# Altium PCB Eln1Project.PcbDoc
Units mm, origin at the board's own origin, x right, y up, seen from the top; angles counter-clockwise.
Board outline 27 x 27 mm, 4 copper layers (Top Layer, Internal Plane 1, Internal Plane 2, Bottom Layer), stack 1.57 mm thick; 35 components, 28 nets, 117 pads, 43 vias.
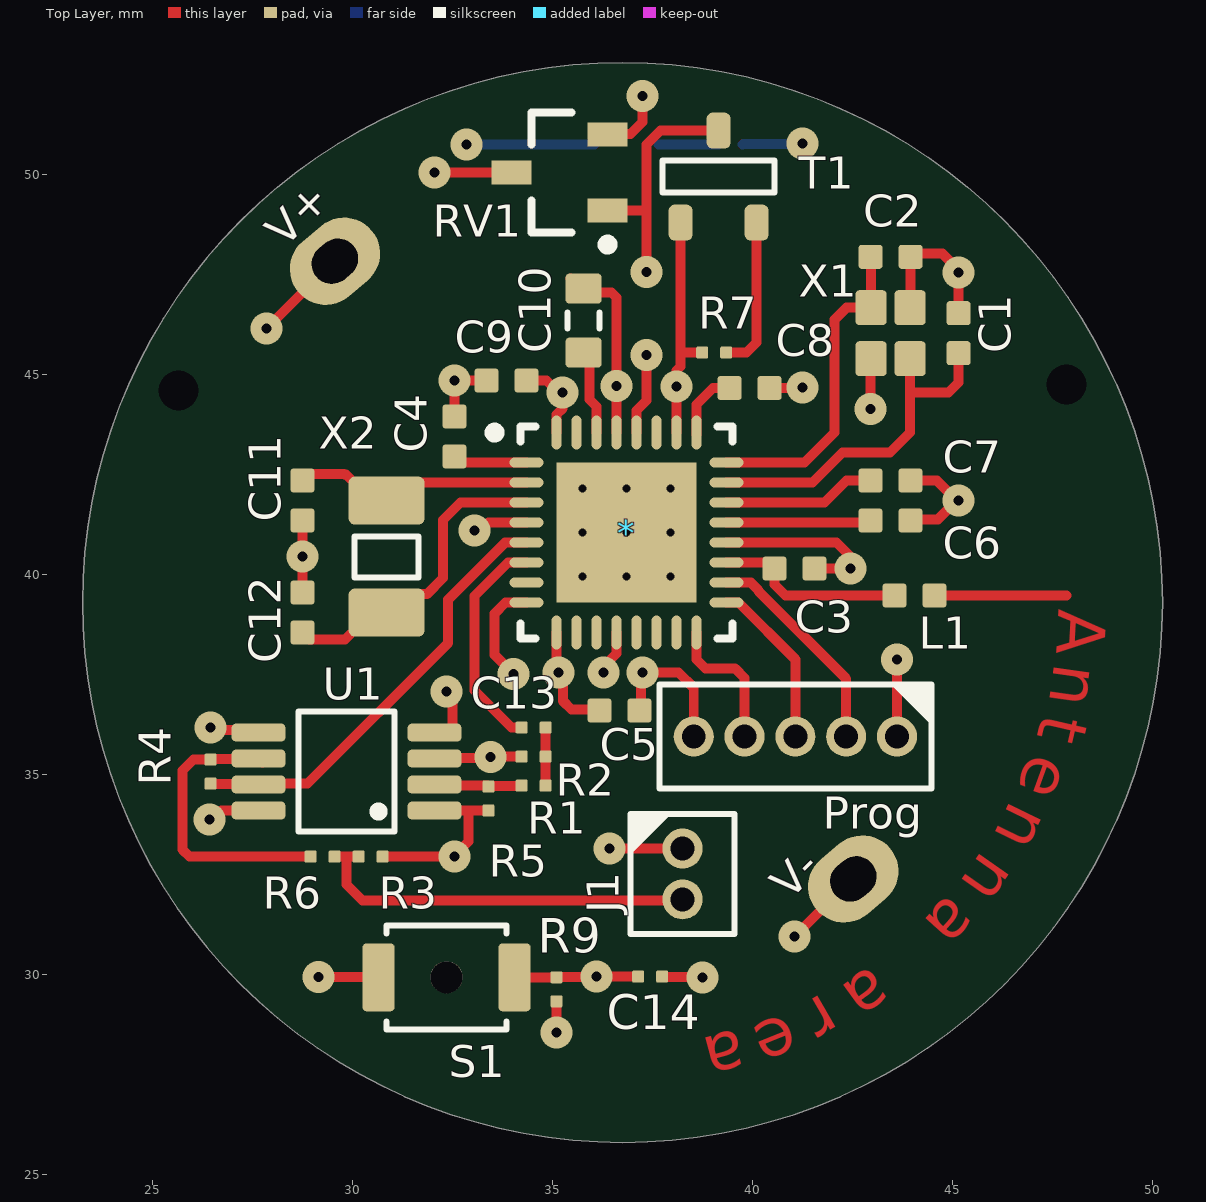
[diagram p0: Top Layer view]
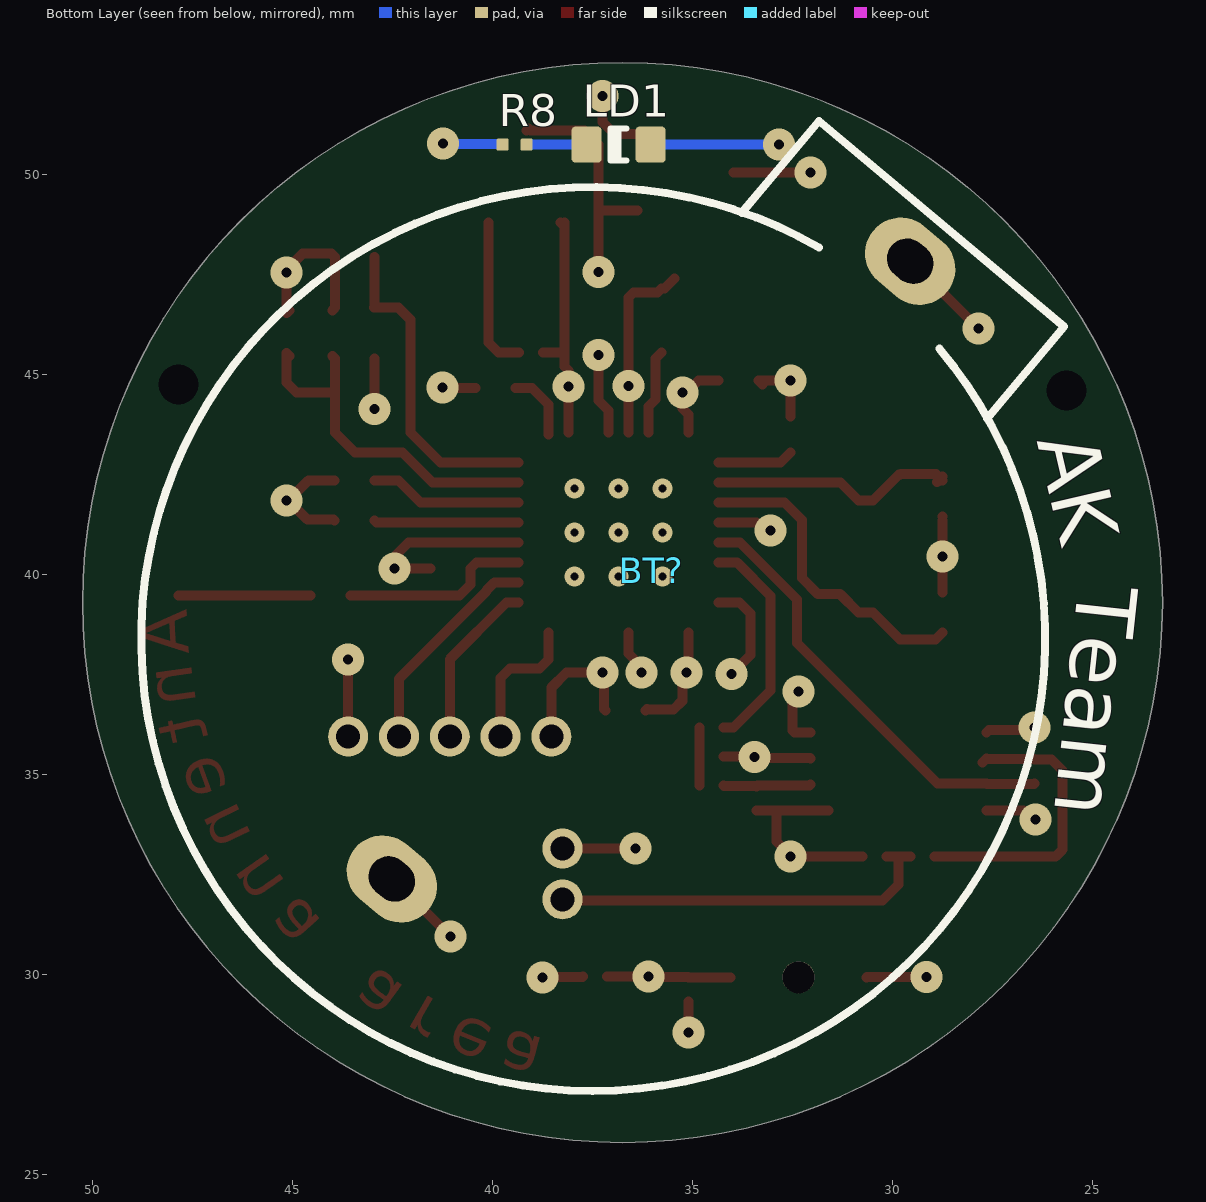
[diagram p1: Bottom Layer view, seen from below]
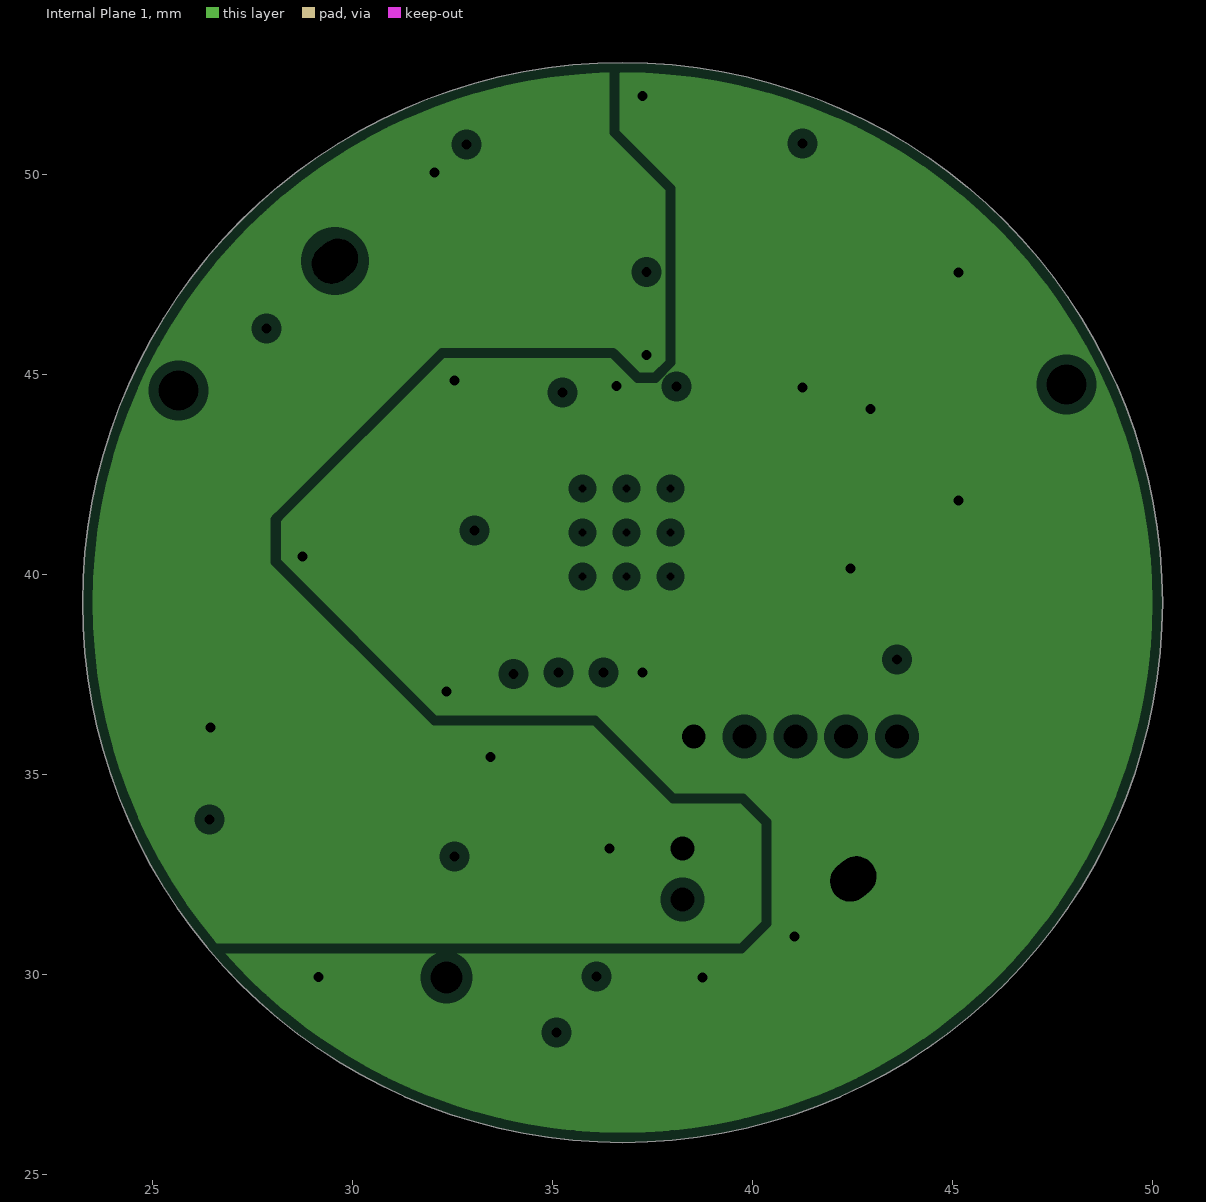
[diagram p2: Internal Plane 1, clearances drawn from the general rule]
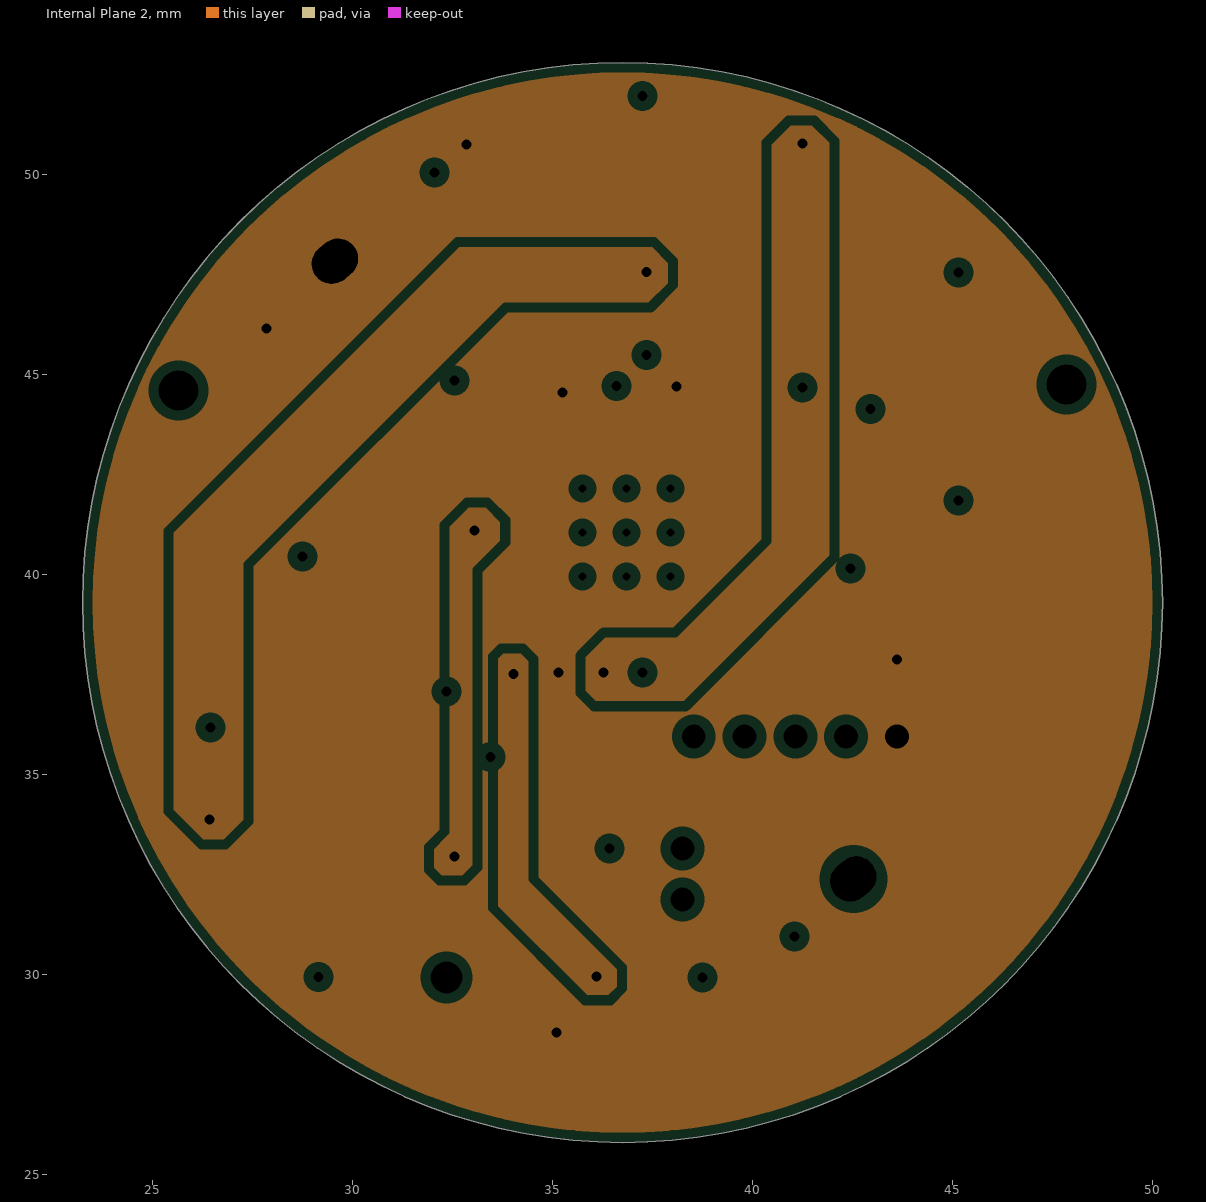
[diagram p3: Internal Plane 2, clearances drawn from the general rule]

## Layer stack, top to bottom
Top Solder: solder mask 0.1, Solder Resist, Dk 3.5
Top Layer: signal copper 0.035
Dielectric 1: core 0.36, FR-4, Dk 4.2
Internal Plane 1: plane copper 0.035, net VSS
Dielectric 3: prepreg 0.71, Dk 4.2
Internal Plane 2: plane copper 0.035, net VDD
Dielectric 2: core 0.36, Dk 4.2
Bottom Layer: signal copper 0.035
Bottom Solder: solder mask 0.1, Solder Resist, Dk 3.5

## Board outline
23.25,39.292 ccw(c36.75,39.292) 36.75,25.792 ccw(c36.75,39.292) 50.25,39.292 ccw(c36.75,39.292) 36.75,52.792 ccw(c36.75,39.292)

## Design rules (kind name [scope] priority, off if disabled: settings)
AcuteAngle [All] p1 off: minimum=9.00000000000000E+0001 checktracksonly=TRUE
AssemblyTestPointUsage [All] p1 off:
AssemblyTestpoint [All] p1 off: testpointundercomponent=TRUE minsize=1.016 maxsize=2.54 preferedsize=1.524 minholesize=0 maxholesize=1.016 preferedholesize=0.813 testpointgrid=0.025 usegrid=TRUE gridtolerance=0 allowsidetop=TRUE allowsidebottom=TRUE
BoardOutlineClearance [All] p1 off: gap=0.25 ignorepadtopadclearanceinfootprint=FALSE
Clearance [All] p1: gap=0.15 ignorepadtopadclearanceinfootprint=FALSE except(0: Arc-Hole Track-Hole SMDPad-Hole THPad-Hole Via-Hole Fill-Hole Poly-Hole Region-Hole Text-Hole)
ComponentClearance [All] p1 off: gap=0.25 collisioncheckmode=3 verticalgap=0.25 showdistances=FALSE
DiffPairsRouting [All] p1 off: maxlimit=0.254 minlimit=0.254 mostfreqgap=0.254 toplayer_minwidth=0.381 toplayer_maxwidth=0.381 toplayer_prefwidth=0.381 bottomlayer_minwidth=0.381 bottomlayer_maxwidth=0.381 bottomlayer_prefwidth=0.381 maxuncoupledlength=12.7
FabricationTestPointUsage [All] p1 off: valid=0 allowmultiple=FALSE
FabricationTestpoint [All] p1 off: side=3 testpointundercomponent=TRUE minsize=1.016 maxsize=2.54 preferedsize=1.524 minholesize=0 maxholesize=1.016 preferedholesize=0.813 testpointgrid=0.025 allowsidetop=TRUE allowsidebottom=TRUE usegrid=TRUE gridtolerance=0
FanoutControl Fanout_BGA [IsBGA] p1 off: bgadir=Out bgaviamode=Centered fanoutstyle=Auto fanoutdirection=Alternating viagrid=0.025 // Fanout_BGA (Default Rule)
FanoutControl Fanout_LCC [IsLCC] p2 off: bgadir=Out bgaviamode=Centered fanoutstyle=Auto fanoutdirection=Alternating viagrid=0.025 // Fanout_LCC (Default Rule)
FanoutControl Fanout_SOIC [IsSOIC] p3 off: bgadir=Out bgaviamode=Centered fanoutstyle=Auto fanoutdirection=Alternating viagrid=0.025 // Fanout_SOIC (Default Rule)
FanoutControl Fanout_Small [(CompPinCount < 5)] p4 off: bgadir=Out bgaviamode=Centered fanoutstyle=Auto fanoutdirection=OutThenIn viagrid=0.025 // Fanout_Small (Default Rule)
FanoutControl Fanout_Default [All] p5 off: bgadir=Out bgaviamode=Centered fanoutstyle=Auto fanoutdirection=Alternating viagrid=0.025 // Fanout_Default (Default Rule)
Height [All] p1 off: minheight=0 maxheight=25.4 prefheight=12.7
HoleSize [All] p1: absolutevalues=TRUE maxlimit=3 minlimit=0.25 maxpercent=80.000 minpercent=20.000
HoleToHoleClearance [All] p1 off: gap=0.25 allowstackedmicrovias=TRUE
LayerPairs [All] p1 off: enforce=TRUE
MinimumAnnularRing [All] p1 off: minimumring=0.175
MinimumSolderMaskSliver [All] p1 off: minsoldermaskwidth=0
NetAntennae [All] p1 off: netantennaetolerance=0
PasteMaskExpansion [All] p1 off: expansion=0
PlaneClearance [All] p1: clearance=0.25
PlaneConnect [All] p1: planeconnectstyle=Direct reliefexpansion=0.5 reliefentries=4 reliefconductorwidth=0.25 reliefairgap=0.25
PolygonConnect [All] p1: connectstyle=Direct reliefconductorwidth=0.25 reliefentries=4 polygonreliefangle="90 Angle" airgapwidth=0.25
RoutingCorners [All] p1 off: cornerstyle=45-Degree minsetback=2.5 maxsetback=2.5
RoutingLayers [All] p1 off: top layer_v5=TRUE bottom layer_v5=TRUE
RoutingPriority [All] p1 off: routingpriority=0
RoutingTopology [All] p1 off: topology=Shortest
RoutingVias [All] p1: holewidth=0.25 width=0.6 viastyle="Through Hole" minholewidth=0.15 minwidth=0.5 maxholewidth=0.9 maxwidth=1.5 useviatemplates=TRUE viatemplateguid#1={857F750E-5D3C-416E-893E-D7E0D3E4223C} viatemplatename#1=v60h25m0mx0
SilkToBoardRegionClearance [All] p1 off:
SilkToSilkClearance [All] p1 off: silktosilkclearance=0
SilkToSolderMaskClearance [IsPad] p1 off: minsilkscreentomaskgap=0 clearancetoexposedcopper=TRUE
SolderMaskExpansion [All] p1: expansion=0
Width [All] p1: maxlimit=4 minlimit=0.15 preferedwidth=0.25
3 further rules are at their usual default settings.

## Components (designator, comment, footprint, x,y, rotation, side; value= is the part's Value field where it differs from the comment)
* "Component_1" QFN50P500X500X90_HS-33N 36.85,41.042 r0 top
BT? "BAT3volt" BTH2032 37.517,38.342 r310 bottom
C1 "" "CAPACITOR 1005 REFLOW" 45.15,46.027 r90 top value=12pF
C2 "" "CAPACITOR 1005 REFLOW" 43.45,47.935 r0 top value=12pF
C3 "" "CAPACITOR 1005 REFLOW" 41.05,40.142 r180 top value=0.8pF
C4 "" "CAPACITOR 1005 REFLOW" 32.55,43.442 r90 top value=100nF
C5 "" "CAPACITOR 1005 REFLOW" 36.675,36.592 r0 top value=100nF
C6 "" "CAPACITOR 1005 REFLOW" 43.45,41.342 r0 top value=N.C.
C7 "" "CAPACITOR 1005 REFLOW" 43.45,42.342 r0 top value=100pF
C8 "" "CAPACITOR 1005 REFLOW" 39.925,44.654 r0 top value=100nF
C9 "" "CAPACITOR 1005 REFLOW" 33.85,44.842 r0 top value=4.7uF
C10 "" "CAPACITOR 1608 REFLOW" 35.775,46.342 r90 top value=1uF
C11 "" "CAPACITOR 1005 REFLOW" 28.75,41.842 r90 top value=12pF
C12 "" "CAPACITOR 1005 REFLOW" 28.75,39.042 r270 top value=12pF
C13 "20n" "CAPACITOR 0603 REFLOW" 34.525,36.167 r0 top
C14 "100pF" "CAPACITOR 0603 REFLOW" 37.44,29.942 r180 top
J1 "*" "PinHeader1x2 P1.27" 38.25,32.507 r270 top
L1 "3.9nH" "INDUCTOR 1005 REFLOW" 44.05,39.467 r0 top
LD1 "*" "LED 1608 REFLOW" 36.85,50.742 r180 bottom
Prog "*" "PinHeader1x5 P1.27" 41.07,35.942 r180 top
R1 "500k" "RESISTOR 0603 REFLOW" 34.525,34.717 r180 top
R2 "500k" "RESISTOR 0603 REFLOW" 34.525,35.442 r0 top
R3 "10k" "RESISTOR 0603 REFLOW" 30.45,32.942 r180 top
R4 "200k" "RESISTOR 0603 REFLOW" 26.45,35.067 r270 top
R5 "100k" "RESISTOR 0603 REFLOW" 33.399,34.392 r270 top
R6 "200k" "RESISTOR 0603 REFLOW" 29.25,32.942 r180 top
R7 "1M" "RESISTOR 0603 REFLOW" 39.042,45.542 r180 top
R8 "220" "RESISTOR 0603 REFLOW" 39.45,50.742 r0 bottom
R9 "2.2k" "RESISTOR 0603 REFLOW" 35.1,29.623 r270 top
RV1 "VoltageReference" ISL21080 35.175,50.042 r180 top
S1 "*" "Push Button C2.5X3.0 OMRON B3U-1000P(M)-B" 32.35,29.923 r0 top
T1 "*" "SOT23 P0.95 C1.6x3.0 H1.3" 39.15,49.942 r90 top
U1 "*" "MSOP8 P0.65 C3.0X3.0 H1.1" 29.85,35.067 r180 top
X1 "32MHz" "Crystal C2.0x1.6 Abracon ABM11W" 43.45,46.027 r90 top
X2 "" "Crystal C3.2x1.5 Abracon ABS07" 30.85,40.442 r270 top value=32.768MHz

## Footprints (in the part's own frame and the unit in brackets; to place one, negate y for a bottom-side part, rotate by r counter-clockwise, add the part's x,y. Pads: shape width x height; smd on the part's side, far side on the other; paste and mask are expansions set on the pad)
BTH2032 [mm] "CR2032 BATTERY HOLDER"
  oval 1.8x2.4 hole 1 slot 1.2 at 90 deg: 1(-12.38,0) 2(7.78,0)
  silkscreen extent -13.6,-11.3 11.25,11.3, body extent -13.45,-11 11.05,11, height 9.7
"CAPACITOR 0603 REFLOW" [mm] "Capacitor SMD 0.6x0.3mm (0201-imperial)"
  rrect25% 0.3x0.3 smd: 1(-0.3,0) 2(0.3,0)
  body extent -0.3,-0.15 0.3,0.15, height 0.3
"CAPACITOR 1005 REFLOW" [mm] "Capacitor SMD 1.0x0.5mm (0402-imperial)"
  rrect25% 0.6x0.6 smd: 1(-0.5,0) 2(0.5,0)
  body extent -0.5,-0.25 0.5,0.25, height 0.5
"CAPACITOR 1608 REFLOW" [mm] "Capacitor SMD 1.6x0.8mm (0603-imperial)"
  rrect25% 0.75x0.9 smd: 1(-0.8,0) 2(0.8,0)
  silkscreen extent -0.2,-0.4 0.2,0.4, body extent -0.8,-0.4 0.8,0.4, height 0.8
"Crystal C2.0x1.6 Abracon ABM11W" [mm] "Crystal C2.0x1.6 Abracon ABM11W, Height 0.5mm"
  rrect25% 0.875x0.775 smd: 1(-0.637,-0.487) 2(0.637,-0.487) 3(0.637,0.487) 4(-0.637,0.487)
  body extent -1,-0.8 1,0.8, height 0.5
"Crystal C3.2x1.5 Abracon ABS07" [mm] "Crystal C3.2x1.5 Abracon ABS07"
  rrect25% 1.2x1.9 smd: 1(-1.4,0) 2(1.4,0)
  silkscreen extent -0.5,-0.8 0.53,0.8, body extent -1.6,-0.8 1.6,0.8, height 0.9
"INDUCTOR 1005 REFLOW" [mm] "Inductor SMD 1.0x0.5mm (0402-imperial)"
  rrect25% 0.6x0.6 smd: 1(-0.5,0) 2(0.5,0)
  body extent -0.5,-0.25 0.5,0.25, height 0.35
ISL21080 [mm] "SOT23, 3-Leads, Body 2,92x2,37mm, Pitch 0,95mm, IPC Medium Density"
  rect 1x0.6 smd: 1(-1.2,0.95) 2(-1.2,-0.95) 3(1.2,0)
  silkscreen extent -1.33,-1.5 0.7,1.92, body extent -0.7,-1.52 0.7,1.52, height 1.12
"LED 1608 REFLOW" [mm] "LED SMD 1.6x0.8mm (0603-imperial)"
  rrect25% 0.75x0.9 smd: 1(-0.8,0) 2(0.8,0)
  silkscreen extent -0.2,-0.4 0.2,0.4, body extent -0.8,-0.4 0.8,0.4, height 0.45
"MSOP8 P0.65 C3.0X3.0 H1.1" [mm] "MSOP, 8-Leads, Body 3.00x3.00mm, Pitch 0.65mm, IPC Medium Density"
  rrect50% 1.35x0.45 smd: 1(-2.2,0.975) 2(-2.2,0.325) 3(-2.2,-0.325) 4(-2.2,-0.975) 5(2.2,-0.975) 6(2.2,-0.325) 7(2.2,0.325) 8(2.2,0.975)
  silkscreen extent -1.2,-1.5 1.2,1.5, body extent -1.55,-1.55 1.55,1.55, height 1.11
"PinHeader1x2 P1.27" [mm] "Plug connector"
  round 1 hole 0.6: 1(-0.635,0) 2(0.635,0)
  silkscreen extent -1.51,-1.3 1.5,1.3, body extent -1.27,-1.1 1.27,1.1, height 4
"PinHeader1x5 P1.27" [mm] "Plug connector"
  round 1 hole 0.6: 1(-2.54,0) 2(-1.27,0) 3(0,0) 4(1.27,0) 5(2.54,0)
  silkscreen extent -3.4,-1.31 3.4,1.3, body extent -3.17,-1.1 3.17,1.1, height 4
"Push Button C2.5X3.0 OMRON B3U-1000P(M)-B" [mm] "Push Button C2.5X3.0 OMRON B3U-1000P(M)-B"
  rrect25% 0.8x1.7 smd: 1(-1.7,0) 2(1.7,0)
  round 0.8 hole 0.8 unplated: 3(0,0)
  silkscreen extent -1.5,-1.3 1.5,1.3, body extent -1.5,-1.25 1.5,1.25, height 1.6
QFN50P500X500X90_HS-33N [mm] "QFN, 32-Leads, Body 5,00x5,00mm, Pitch 0.50mm, Thermal Pad 3,50x3,50mm, IPC Medium Density"
  oval 0.85x0.25 smd: 1(-2.5,1.75) 2(-2.5,1.25) 3(-2.5,0.75) 4(-2.5,0.25) 5(-2.5,-0.25) 6(-2.5,-0.75) 7(-2.5,-1.25) 8(-2.5,-1.75) 17(2.5,-1.75) 18(2.5,-1.25) 19(2.5,-0.75) 20(2.5,-0.25) 21(2.5,0.25) 22(2.5,0.75) 23(2.5,1.25) 24(2.5,1.75)
  oval 0.25x0.85 smd: 9(-1.75,-2.5) 10(-1.25,-2.5) 11(-0.75,-2.5) 12(-0.25,-2.5) 13(0.25,-2.5) 14(0.75,-2.5) 15(1.25,-2.5) 16(1.75,-2.5) 25(1.75,2.5) 26(1.25,2.5) 27(0.75,2.5) 28(0.25,2.5) 29(-0.25,2.5) 30(-0.75,2.5) 31(-1.25,2.5) 32(-1.75,2.5)
  rect 3.5x3.5 smd: 33(0,0)
  silkscreen extent -3.42,-2.65 2.65,2.65, body extent -2.5,-2.5 2.5,2.5, height 0.9
"RESISTOR 0603 REFLOW" [mm] "Resistor SMD 0.6x0.3mm (0201-imperial)"
  rrect25% 0.3x0.3 smd: 1(-0.3,0) 2(0.3,0)
  body extent -0.3,-0.15 0.3,0.15, height 0.25
"SOT23 P0.95 C1.6x3.0 H1.3" [mm] "SOT23, 3-Leads, Body 1.6x3.0mm, Pitch 0.95mm, IPC Medium Density"
  rrect50% 0.9x0.6 smd: 1(-1.15,0.95) 2(-1.15,-0.95) 3(1.15,0)
  silkscreen extent -0.4,-1.4 0.4,1.4, body extent -0.8,-1.5 0.8,1.5, height 1.3

## Part data
BT?: library part BATH_CR2032, "BATTERY HOLDER, CR2032", .=http://www.chila.ir, MANF_P#=-
C1 C2 C3 C4 C5 C6 C7 C8 C9 C10 C11 C12 C13 C14: library part Capacitor, "Capacitor"
J1: library part PinHeader1x2, "Plug connector"
L1: library part Inductor, "Inductor"
LD1: library part LED, "LED generic"
Prog: library part PinHeader1x5, "Plug connector"
R1 R2 R3 R4 R5 R6 R7 R8 R9: library part Resistor, "Resistor"
S1: library part "Push Button 2Pins", "Push Button, 2 pins"
T1: library part "MOS-P SOT23 G-S-D", "Generic MOS-P"
U1: library part "OPA DUAL", "Generic dual OPA 8 pins"
X1: library part "Crystal C2.0x1.6 Abracon ABM11W", "Crystal C2.0x1.6 Abracon ABM11W"
X2: library part "Crystal C3.2x1.5 Abracon ABS07", "Crystal C3.2x1.5 Abracon ABS07"

## Free pads (board coordinates)
  round 0.8 hole 1: 2(25.65,44.592) 3(47.85,44.742)

## Via types
v1: diameter 0.8, hole 0.25, Top Layer to Bottom Layer, 34 vias
v2: diameter 0.5, hole 0.2, Top Layer to Bottom Layer, 9 vias

## Nets (pads, with @x,y where several pads share a name; then routed paths per layer and width w, separated by ;. In a path a pad name is that pad's centre, name@x,y a point inside that pad or via, vN(x,y) a via of type N, cw(c..) or ccw(c..) an arc to the next point about the centre after c; other vN are vias at no path point)
GND: *.28 J1.1 R2.1 RV1.3 U1.3 U1.5 | length 9.2
  Top Layer w0.25: v1(26.45,36.167) 26.512,36.104 27.588,36.104 U1.5 ; U1.3 32.069,35.411 33.431,35.411 v1(33.45,35.43) 33.462,35.442 R2.1 ; v1(32.05,50.042) RV1.3 ; v1(36.425,33.142) J1.1 ; *.28 37.1,44.092 37.35,44.342 v1(37.35,45.483)
Net*_1: *.1 C4.1 | length 1.9
  Top Layer w0.25: C4.1@32.55,43.042 32.8,42.792 *.1
Net*_2: *.2 C11.2 X2.1 | length 6.3
  Top Layer w0.25: C11.2 28.917,42.509 29.783,42.509 29.8,42.492 29.837,42.492 30.486,41.842 X2.1 31.3,42.292 *.2 ; C11.2@28.75,42.442 28.8,42.392 C11.2@28.89,42.302
Net*_3: *.3 C12.2 X2.2 | length 7.9
  Top Layer w0.25: C12.2 28.925,38.367 29.811,38.367 30.486,39.042 X2.2 31.31,39.502 31.862,39.502 32.262,39.902 32.262,41.355 32.7,41.792 *.3
Net*_5: *.5 R4.2 U1.7 | length 11
  Top Layer w0.25: R4.2 26.462,34.755 27.637,34.755 27.65,34.767 28.875,34.767 32.392,38.284 32.392,39.366 33.817,40.792 *.5
Net*_8: *.8 C14.2 R9.1 S1.2 | length 5.7
  Top Layer w0.25: v1(34.025,37.507) 33.554,37.978 33.554,39.021 33.825,39.292 *.8 ; S1.2 R9.1 35.109,29.933 36.09,29.933 v1(36.1,29.942) C14.2
Net*_12: *.12 R8.2 | length 2.6
  Top Layer w0.25: v1(36.275,37.542) 36.275,37.691 36.6,38.016 *.12
  Bottom Layer w0.25: R8.2 39.762,50.754 41.23,50.754 v1(41.243,50.767)
Net*_16: *.16 Prog.4 | length 3.5
  Top Layer w0.25: *.16 38.6,37.867 38.825,37.642 39.565,37.642 39.8,37.407 Prog.4
Net*_17: *.17 Prog.3 | length 4.2
  Top Layer w0.25: *.17 39.65,39.292 41.07,37.872 Prog.3
Net*_18: *.18 Prog.2 | length 5.4
  Top Layer w0.25: *.18 39.955,39.792 39.975,39.772 40.15,39.597 40.15,39.576 42.34,37.386 Prog.2
Net*_19: *.19 C3.2 L1.1 | length 4.8
  Top Layer w0.25: *.19 40.4,40.292 C3.2 40.55,39.742 40.825,39.467 L1.1
Net*_21: *.21 C6.1 | length 3.6
  Top Layer w0.25: *.21 42.9,41.292 C6.1
Net*_22: *.22 C7.1 | length 3.8
  Top Layer w0.25: *.22 41.8,41.792 42.35,42.342 C7.1
Net*_23: *.23 C1.1 X1.1 | length 9.2
  Top Layer w0.25: *.23 41.5,42.292 42.25,43.042 43.437,43.042 43.937,43.542 43.937,44.542 ; X1.1@44.006,45.458 X1.1 43.937,44.542 ; C1.1@45.081,45.458 C1.1 45.15,44.792 44.9,44.542 43.937,44.542
Net*_24: *.24 C2.1 X1.3 | length 8.1
  Top Layer w0.25: *.24 41.3,42.792 42.05,43.542 42.05,46.364 42.35,46.664 X1.3 42.956,46.67 42.956,47.928 C2.1
Net*_25: *.25 C8.1 | length 1.7
  Top Layer w0.25: *.25@38.6,43.492 *.25 38.6,44.241 39.013,44.654 C8.1
Net*_30: *.30 C10.1 | length 2.1
  Top Layer w0.25: C10.1 35.925,45.392 35.925,44.367 36.1,44.192 *.30
NetC13_2: C13.2 R1.1 R2.2 | length 1.5
  Top Layer w0.25: R1.1 R2.2 C13.2
NetJ1_2: J1.2 R3.2 R6.1 | length 9.9
  Top Layer w0.25: R6.1 29.85,32.942 ; R3.2 29.85,32.942 ; J1.2 38.22,31.842 30.25,31.842 29.85,32.242 29.85,32.942
  Bottom Layer w0.25: J1.2@38.235,31.857 J1.2
NetLD1_1: LD1.1 R8.1 | length 1.5
  Bottom Layer w0.25: LD1.1 R8.1
NetR1_2: R1.2 R5.1 U1.2 | length 2.2
  Top Layer w0.25: U1.2 32.075,34.717 33.374,34.717 R5.1 33.411,34.705 34.212,34.705 R1.2
NetR4_1: R4.1 R6.2 U1.6 | length 7.4
  Top Layer w0.25: U1.6@27.75,35.292 U1.6 27.637,35.38 26.462,35.38 R4.1 26.025,35.367 25.749,35.091 25.749,33.113 25.921,32.942 R6.2
NetR7_1: R7.1 T1.2 | length 3.9
  Top Layer w0.25: R7.1 39.85,45.542 40.1,45.792 T1.2
OutAmp1: *.4 R3.1 R5.2 U1.1 | length 6.3
  Top Layer w0.25: R3.1 v1(32.55,32.942) 32.55,32.967 32.9,33.317 32.9,34.092 ; U1.1@31.6,34.092 U1.1 32.9,34.092 ; v1(33.05,41.092) 33.199,41.092 33.399,41.292 *.4 ; R5.2 32.9,34.092
VDD: *.9 *.26 *.32 BT?.1 C5.1 C9.2 LD1.2 Prog.1 R7.2 R9.2 T1.1 | length 19.2
  Top Layer w0.25: v1(27.85,46.142) 29.534,47.826 BT?.1 ; C9.2 34.85,44.842 35.15,44.542 v1(35.25,44.542) 35.255,44.537 35.255,44.147 35.1,43.992 *.32 ; v1(35.1,28.542) R9.2 ; *.9 35.1,37.592 v1(35.15,37.542) 35.255,37.437 35.255,36.837 35.475,36.617 36.125,36.617 36.137,36.63 C5.1 ; *.26 v1(38.1,44.696) 38.1,45.092 38.2,45.192 38.2,45.542 ; T1.1 38.2,45.542 ; T1.1@38.25,48.742 T1.1@38.3,48.792 ; R7.2 38.2,45.542 ; Prog.1 v1(43.61,37.872)
  Bottom Layer w0.25: v1(27.85,46.142) v1@27.85,46.148 ; BT?.1@29.685,47.726 BT?.1@29.716,47.726 ; v1(32.845,50.742) LD1.2
VDD_M: RV1.1 T1.3 U1.8 | length 7.5
  Top Layer w0.25: v1(26.424,33.867) 26.499,33.867 26.724,34.092 U1.8 ; RV1.1 37.35,49.092 ; v1(37.35,47.555) 37.35,49.092 ; T1.3 39.1,51.142 39.05,51.092 37.7,51.092 37.35,50.742 37.35,49.092
VinSquare: *.6 C13.1 | length 5.6
  Top Layer w0.25: C13.1 33.974,36.167 33.05,37.091 33.05,39.459 33.883,40.292 *.6
VSS: *.20 *.29 BT?.2 C1.2 C2.2 C3.1 C4.2 C5.2 C6.2 C7.2 C8.2 C9.1 C10.2 C11.1 C12.1 C14.1 Prog.5 RV1.2 S1.1 U1.4 X1.2 X1.4 | length 33.4
  Top Layer w0.25: C12.1 v1(28.75,40.442) C11.1 ; v1(29.15,29.933) 30.64,29.933 S1.1 ; U1.4 32.45,36.042 32.5,36.092 32.5,36.917 v1(32.35,37.067) ; C4.2 v1(32.55,44.842) C9.1 C9.1@33.25,44.742 ; C10.2@35.45,47.392 35.7,47.142 C10.2 35.875,47.042 36.475,47.042 36.6,46.917 v1(36.6,44.704) *.29 ; RV1.2 36.389,51.006 36.95,51.006 37.25,51.306 v1(37.25,51.953) ; C5.2 37.21,36.627 37.21,37.507 v1(37.245,37.542) 38.15,37.542 38.53,37.162 Prog.5 ; C14.1 37.75,29.933 38.74,29.933 v1(38.75,29.923) ; *.20 42.1,40.792 42.45,40.442 v1(42.45,40.142) C3.1 ; C8.2 40.432,44.661 41.243,44.661 v1(41.25,44.669) ; v1(41.05,30.942) 41.05,30.947 42.486,32.382 BT?.2 ; v1(42.95,44.127) X1.4@42.95,45.389 ; X1.2 X1.2@44.006,46.595 ; X1.2@43.944,46.67 43.944,47.928 C2.2 44.028,48.013 44.75,48.013 45.15,47.613 v1(45.15,47.542) C1.2 C1.2@45.081,46.595 ; C6.2 43.974,41.366 44.63,41.366 45.106,41.842 44.606,42.342 C7.2
  Bottom Layer w0.25: v1(41.05,30.942) 41.05,31.097 v1@41.095,31.142 ; BT?.2@42.336,32.382 BT?.2
  other v1: 45.154,41.842
pads on no net: *.7 *.10 *.11 *.13 *.14 *.15 *.27 *.31 *.33 L1.2 S1.3
copper on no net: | length 3.3
  Top Layer w0.25: 44.55,39.467 47.85,39.467
  other v2: 35.75,39.942 36.85,39.942 37.95,39.942 35.75,41.042 36.85,41.042 37.95,41.042 35.75,42.142 36.85,42.142 37.95,42.142

## Polygon pours and split planes (outlines as drawn)
GND on Internal Plane 1 (split plane): 36.42,51.042 36.43,50.992 36.458,50.95 37.82,49.588 37.82,45.346 37.517,45.042 37.183,45.042 36.607,45.618 36.565,45.646 36.515,45.656 32.235,45.656 32.185,45.646 32.143,45.618 28.158,41.634 27.988,41.463 27.96,41.421 27.95,41.372 27.95,40.313 27.96,40.263 27.988,40.221 31.958,36.25 32,36.222 32.05,36.213 36.009,36.213 37.921,34.3 37.963,34.272 38.012,34.263 39.705,34.263 40.22,33.747 40.22,31.321 39.671,30.772 26.606,30.772 26.391,31.031 26.089,31.424 25.802,31.828 25.531,32.243 25.275,32.667 25.036,33.101 24.812,33.543 24.606,33.994 24.416,34.451 24.244,34.916 24.089,35.387 23.952,35.863 23.832,36.344 23.731,36.829 23.648,37.317 23.584,37.809 23.537,38.302 23.509,38.797 23.5,39.279 23.502,39.292 23.5,39.305 23.509,39.787 23.537,40.282 23.584,40.776 23.648,41.267 23.731,41.755 23.832,42.24 23.952,42.721 24.089,43.197 24.244,43.668 24.416,44.133 24.606,44.591 24.812,45.041 25.036,45.483 25.275,45.917 25.531,46.341 25.802,46.756 26.089,47.16 26.391,47.553 26.707,47.935 27.037,48.304 27.381,48.661 27.738,49.005 28.107,49.335 28.489,49.651 28.882,49.953 29.286,50.24 29.701,50.511 30.125,50.767 30.559,51.006 31.001,51.23 31.451,51.436 31.909,51.626 32.374,51.798 32.845,51.953 33.321,52.09 33.802,52.21 34.287,52.311 34.775,52.394 35.266,52.458 35.76,52.505 36.255,52.533 36.42,52.536
VSS on Internal Plane 1 (split plane): 153 vertices, not listed, extent 26.829,26.042 50,52.542
VDD on Internal Plane 2 (split plane): 177 vertices, not listed, extent 23.5,26.042 50,52.542
VDD_M on Internal Plane 2 (split plane): 37.883,47.774 37.883,47.283 37.393,46.794 33.822,46.794 33.772,46.784 33.73,46.756 27.308,40.334 27.28,40.292 27.271,40.242 27.271,33.871 26.771,33.372 26.279,33.372 25.529,34.121 25.529,41.027 32.678,48.175 37.482,48.175
Net*_8 on Internal Plane 2 (split plane): 34.395,37.82 34.395,32.381 34.405,32.331 34.433,32.289 36.608,30.115 36.608,29.695 36.392,29.48 35.87,29.48 33.641,31.709 33.641,36.629 33.641,37.883 33.771,38.013 34.203,38.013
OutAmp1 on Internal Plane 2 (split plane): 33.688,41.296 33.688,40.846 33.034,40.192 33.006,40.15 32.996,40.1 32.996,32.73 32.738,32.472 32.233,32.472 32.039,32.666 32.039,33.123 32.392,33.475 32.42,33.517 32.429,33.567 32.429,41.179 32.913,41.663 33.321,41.663
Net*_12 on Internal Plane 2 (split plane): 41.92,50.778 41.92,40.477 38.273,36.829 36.091,36.829 35.829,37.091 35.829,37.917 36.325,38.413 38.06,38.413 38.11,38.422 38.152,38.45 40.442,40.74 40.47,40.782 40.479,40.832 40.479,50.736 40.954,51.211 41.487,51.211

## Other copper
Top Layer:
  text "A" at 47.65,39.142 h1.2 r267
  text "n" at 47.55,37.809 h1.2 r262
  text "t" at 47.25,36.567 h1.2 r257
  text "e" at 46.95,35.592 h1.2 r250
  text "n" at 46.463,34.392 h1.2 r244
  text "n" at 45.75,33.122 h1.2 r235
  text "a" at 44.9,32.042 h1.2 r228
  text "a" at 42.962,30.242 h1.2 r216
  text "r" at 41.75,29.542 h1.2 r210
  text "e" at 40.85,29.042 h1.2 r202
  text "a" at 39.65,28.631 h1.2 r195
Internal Plane 1 (plane layer: these items are gaps in the copper):
  lines w0.254: 26.35,30.642 39.725,30.642 40.35,31.267 40.35,33.8 39.758,34.392 38.012,34.392 36.062,36.342 33.65,36.342 32.05,36.342 28.079,40.313 28.079,41.372 28.25,41.542 32.235,45.527 36.515,45.527 37.129,44.913 37.571,44.913 37.95,45.292 37.95,49.642 36.55,51.042 36.55,52.572 36.82,52.842
Internal Plane 2 (plane layer: these items are gaps in the copper):
  lines w0.254: 25.4,34.067 25.4,41.08 32.624,48.304 37.535,48.304 38.012,47.827 38.012,47.23 37.446,46.664 33.822,46.664 27.4,40.242 27.4,33.817 26.825,33.242 26.225,33.242 25.4,34.067 ; 31.909,32.613 31.909,33.176 32.3,33.567 32.3,41.233 32.859,41.792 33.374,41.792 33.817,41.349 33.817,40.792 33.126,40.1 33.126,32.676 32.791,32.342 32.18,32.342 31.909,32.613 ; 33.512,31.655 35.817,29.35 36.446,29.35 36.737,29.642 36.737,30.169 34.525,32.381 34.525,37.873 34.256,38.142 33.717,38.142 33.512,37.936 33.512,36.629 33.512,31.655 ; 35.7,37.037 35.7,37.971 36.271,38.542 38.06,38.542 40.35,40.832 40.35,50.79 40.9,51.341 41.541,51.341 42.05,50.832 42.05,40.423 38.327,36.7 36.037,36.7 35.7,37.037

## Silkscreen, mask and mechanical layers (free items; w line width, h text height)
Top Overlay:
  text "V+" at 28.3,48.142 h0.8 r45
  text "V-" at 40.925,31.828 h0.8 r45
  text "AK Team project" at 5,15 h3
  text "Alexandre Ferreira" at 4.9,9.9 h3
  text "Ecoeur Kenny" at 5,5 h3
Bottom Overlay:
  text "AK" at 26.391,43.342 h1.5 r76.88
  text "Team" at 25.35,39.772 h1.5 r96.15
Mechanical 1:
  circle w0.254: c36.75,39.292 r13.5
  lines w0.15: 0,0 63.4,0 63.4,63.1 0,63.1 0,0
  lines w0.254: 35.746,29.105 ccw(c36.763,39.242) 46.874,40.484 49.249,40.484 ; 35.75,26.742 35.75,29.121 ; 35.771,26.739 ccw(c36.763,39.292) 49.303,40.429